# Altium PCB PortableCharger.PcbDoc
Units mm, origin at the board's own origin, x right, y up, seen from the top; angles counter-clockwise.
Board outline 40 x 25.02 mm, 2 copper layers (Top Layer, Bottom Layer); 30 components, 18 nets, 108 pads, 10 vias.
Unrouted connection lines stored in the file: 2.
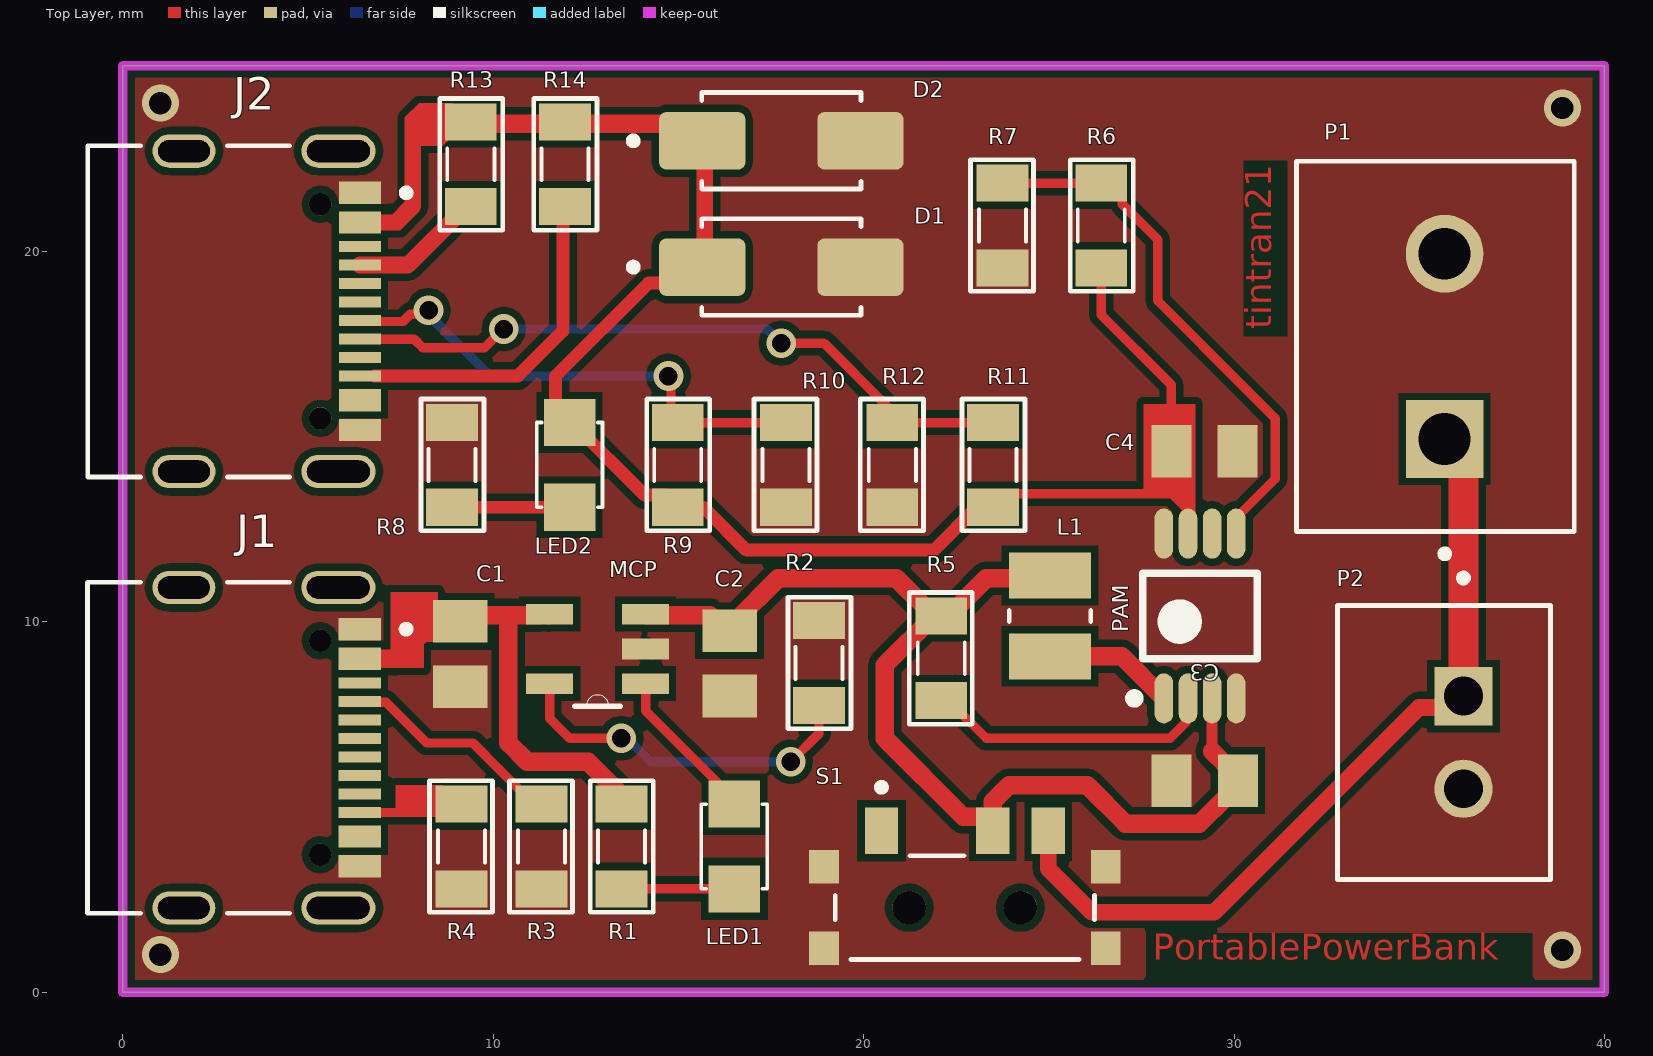
[diagram p0: Top Layer view]
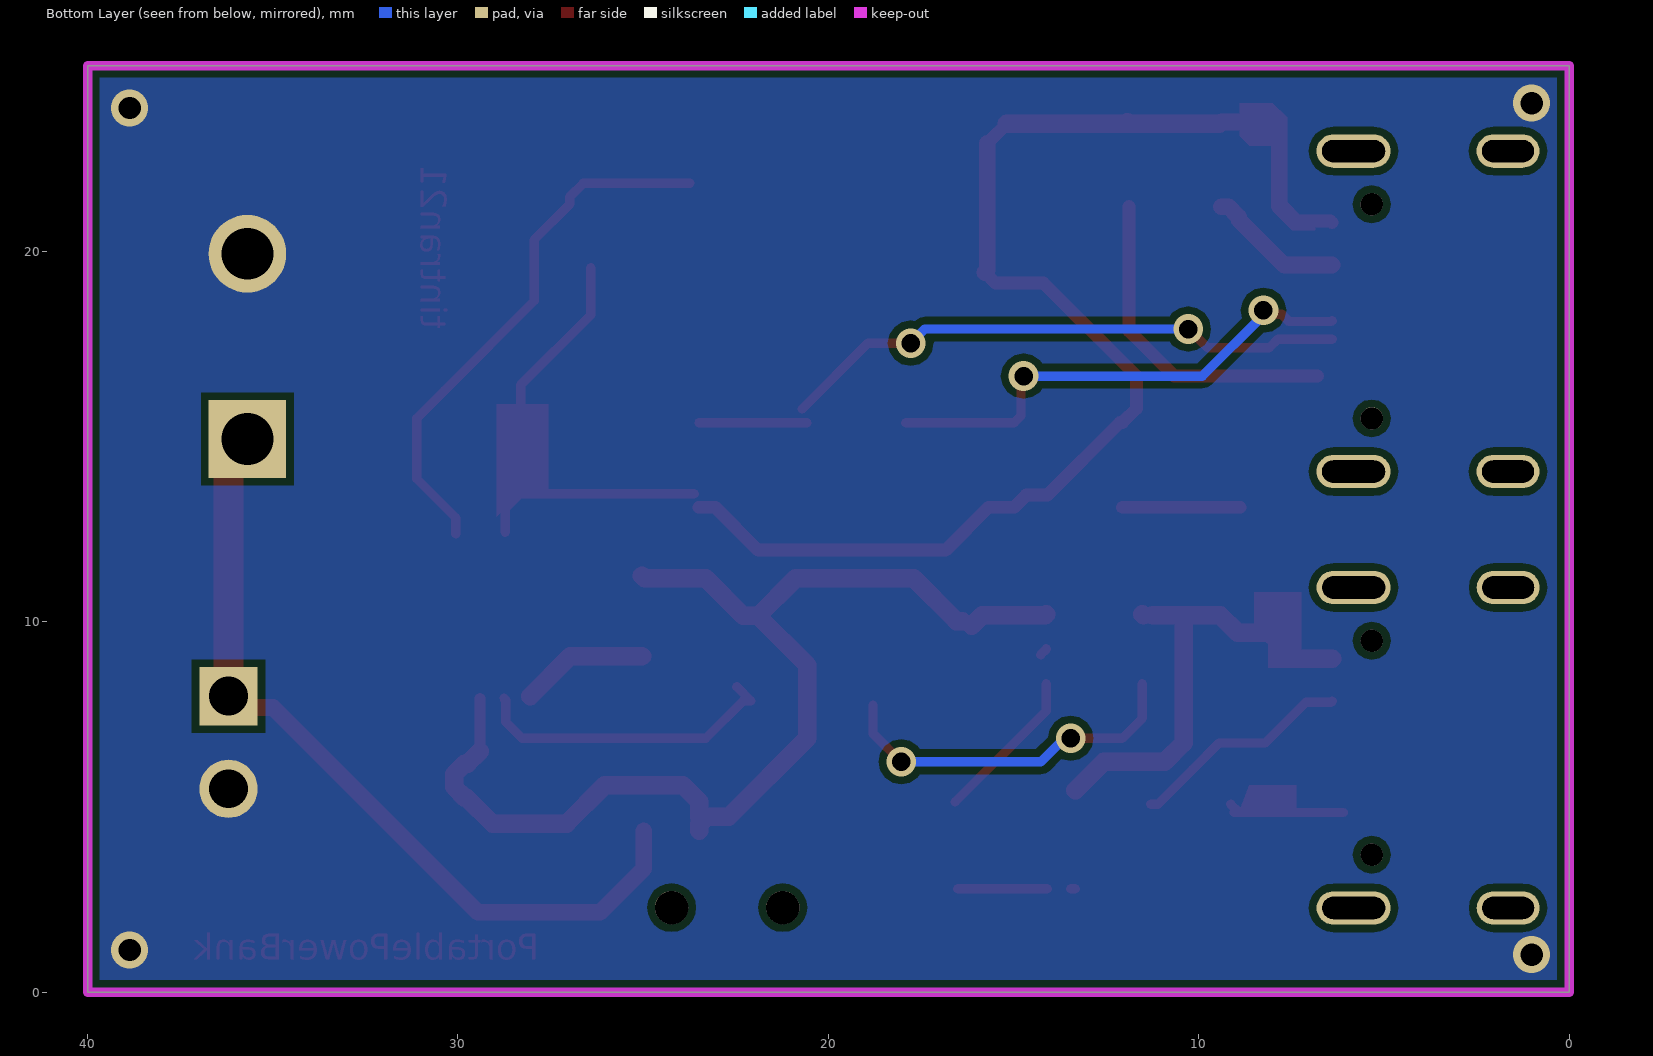
[diagram p1: Bottom Layer view, seen from below]
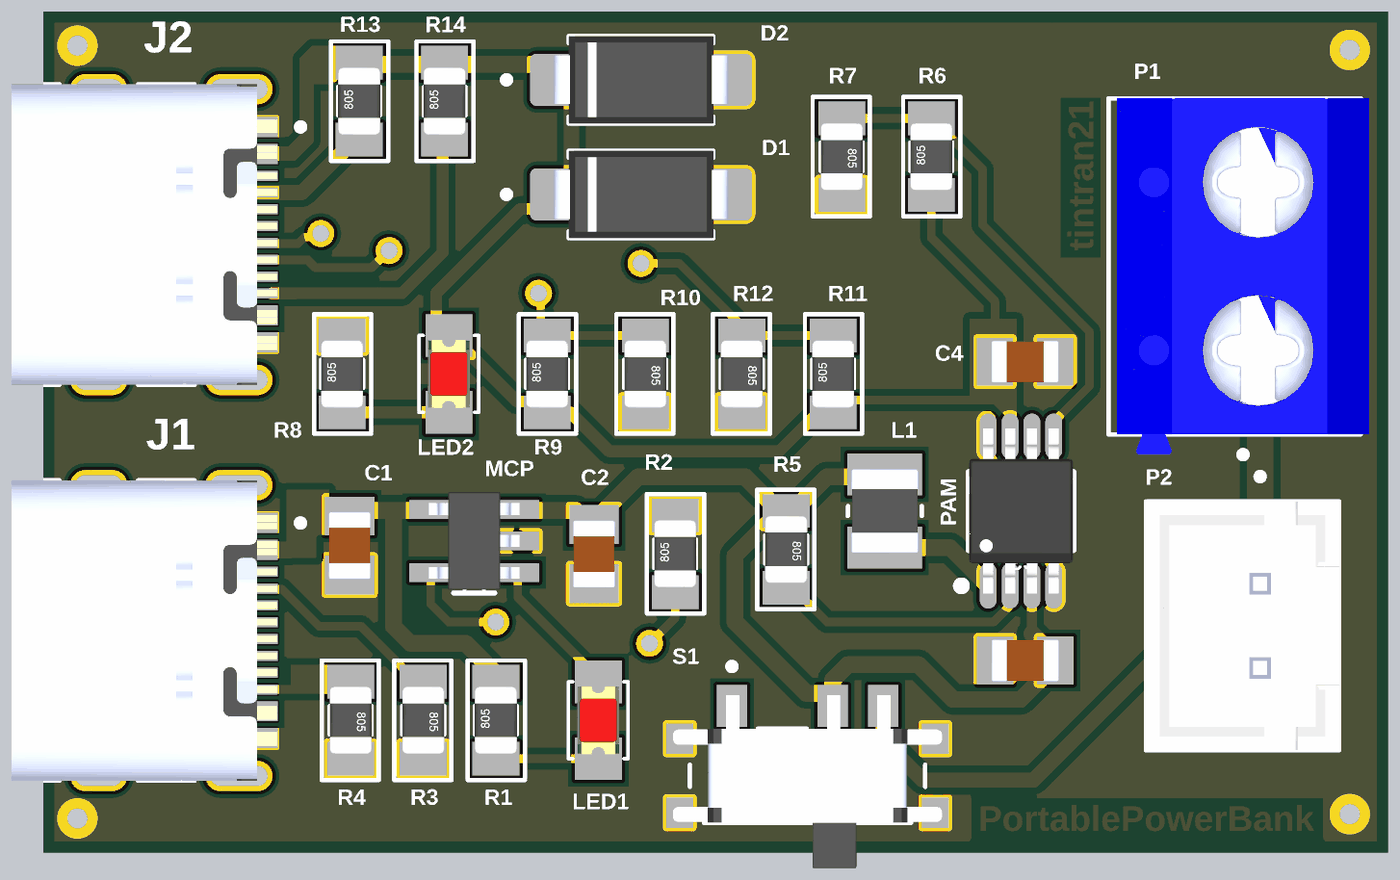
[diagram p2: 3D render of the assembled board from above, using the file's embedded part models]

## Layer stack, top to bottom
Top Solder: solder mask 0.0102, Solder Resist, Dk 3.5
Top Layer: signal copper 0.0356
Dielectric 1: dielectric 0.32, FR-4, Dk 4.8
Bottom Layer: signal copper 0.0356
Bottom Solder: solder mask 0.0102, Solder Resist, Dk 3.5

## Board outline
0,0 40,0 40,25.019 0,25.019

## Design rules (kind name [scope] priority, off if disabled: settings)
Clearance [All] p1: gap=0.2 ignorepadtopadclearanceinfootprint=TRUE
PolygonConnect [All] p1: connectstyle=Direct reliefconductorwidth=0.254 reliefentries=4 polygonreliefangle="90 Angle" airgapwidth=0.254
RoutingVias [All] p1: holewidth=0.711 width=1.27 viastyle="Through Hole" minholewidth=0.711 minwidth=1.27 maxholewidth=0.711 maxwidth=1.27
SolderMaskExpansion [All] p1: expansion=0.102 istentingtop=FALSE
Width PowerNets [InNetClass('PowerNets')] p1: maxlimit=1.3 minlimit=0.5 preferedwidth=0.5 minimp=50.000000 maximp=50.000000 favimp=50.000000
Width [All] p2: maxlimit=0.45 minlimit=0.254 preferedwidth=0.35
30 further rules are at their usual default settings.

## Classes and differential pairs
net class PowerNets: 5VIN NetC2_2 NetL1_2
component class Sheet2_StepUpDCDCConverter: C3 C4 D1 D2 J2 L1 LED2 PAM R5 R6 R7 R8 R9 R10 R11 R12 R13 R14
component class Sheet1_ChargeManagementControllers: C1 C2 J1 LED1 MCP P1 P2 R1 R2 R3 R4 S1

## Components (designator, comment, footprint, x,y, rotation, side; value= is the part's Value field where it differs from the comment)
C1 "4,7 uF" CAPC2012X150N 9.113,9.135 r270 top
C2 "4,7 uF" CAPC2012X150N 16.383,8.881 r90 top
C3 "22uF" CAPC2012X140N 29.21,5.715 r0 top
C4 "22uF" CAPC2012X140N 29.204,14.605 r180 top
D1 "40V1A" DIOM4326X240N 17.78,19.578 r0 top
D2 "40V1A" DIOM4326X240N 17.78,22.987 r0 top
J1 "TYPE-C-31-M-12" HRO_TYPE-C-31-M-12 1.651,6.604 r270 top
J2 "TYPE-C-31-M-12" HRO_TYPE-C-31-M-12 1.654,18.384 r270 top
L1 "2.2uH" INDC2520X100N 25.033,10.16 r270 top
LED1 "LED" LED-0805-Red 16.51,2.794 r90 top value="LED 3 - 5 ly 2 Colour"
LED2 "LED" LED-0805-Red 12.065,15.382 r270 top value="LED 3 - 5 ly 2 Colour"
MCP "MCP73831" SOT95P280X145-5N 12.819,9.271 r180 top
P1 "BAT OPT1" HANDSON_KF301-2P 35.687,17.439 r90 top
P2 "B2B-XH-A" JST_B2B-XH-A 35.67,6.745 r90 top
PAM "PAM2401" TSOP65P490X110-8N 29.083,10.16 r90 top
R1 "1K" RES-SMD-0805 13.462,3.937 r90 top
R2 "2K" RES-SMD-0805 18.796,8.89 r90 top
R3 "5.1K" RES-SMD-0805 11.303,3.937 r270 top
R4 "5.1K" RES-SMD-0805 9.144,3.937 r270 top
R5 "750k" RES-SMD-0805 22.098,9.017 r270 top
R6 "750k" RES-SMD-0805 26.416,20.701 r90 top
R7 "100k" RES-SMD-0805 23.749,20.701 r270 top
R8 "4.7k" RES-SMD-0805 8.89,14.239 r90 top
R9 "75k" RES-SMD-0805 14.986,14.239 r90 top
R10 "51k" RES-SMD-0805 17.907,14.239 r270 top
R11 "75k" RES-SMD-0805 23.495,14.239 r90 top
R12 "51K" RES-SMD-0805 20.777,14.239 r270 top
R13 "56k" RES-SMD-0805 9.398,22.352 r90 top
R14 "56k" RES-SMD-0805 11.938,22.352 r90 top
S1 "SW" SW_MSK12C02 22.733,2.286 r0 top

## Footprints (in the part's own frame and the unit in brackets; to place one, negate y for a bottom-side part, rotate by r counter-clockwise, add the part's x,y. Pads: shape width x height; smd on the part's side, far side on the other; paste and mask are expansions set on the pad)
CAPC2012X140N [mm]
  rect 1.08x1.42 smd paste+0 mask+0.102: 1(-0.895,0) 2(0.895,0)
  body extent -1,-0.63 1,0.63, height 1.4
CAPC2012X150N [mm]
  rect 1.15x1.47 smd: 1(-0.88,0) 2(0.88,0)
  body extent -1,-0.63 1,0.63, height 1.5
DIOM4326X240N [mm]
  rrect25% 2.33x1.55 smd: A(2.135,0) C(-2.135,0)
  silkscreen extent -4.1,-1.3 2.15,1.3, body extent -2.6,-1.3 2.6,1.3, height 2.4
HANDSON_KF301-2P [mm]
  rect 2.1x2.1 / inner round 2.1 / far side rect 2.1x2.1 hole 1.4: 1(-2.5,0)
  round 2.1 hole 1.4: 2(2.5,0)
  silkscreen extent -5.7,-3.5 5,4, body extent -5.6,-3.75 5,3.75, height 10
HRO_TYPE-C-31-M-12 [mm]
  rect 0.6x1.14 smd mask+0.05: A1_B12(-3.2,4.75) A4_B9(-2.4,4.75) B1_A12(3.2,4.75) B4_A9(2.4,4.75)
  rect 0.3x1.14 smd mask+0.05: A5(-1.25,4.75) A6(-0.25,4.75) A7(0.25,4.75) A8(1.25,4.75) B5(1.75,4.75) B6(0.75,4.75) B7(-0.75,4.75) B8(-1.75,4.75)
  oval 0.9x2 hole 0.6 slot 1.7 at 90 deg: S1(-4.325,4.17) S2(4.325,4.17)
  oval 0.9x1.7 hole 0.6 slot 1.4 at 90 deg: S3(-4.325,0) S4(4.325,0)
  round 0.6 hole 0.6 unplated: ""(-2.89,3.68) ""(2.89,3.68)
  silkscreen extent -4.47,-2.6 4.47,6.1, body extent -4.47,-2.6 4.47,5.31, height 3.31
INDC2520X100N [mm]
  rect 1.24x2.22 smd: 1(-1.09,0) 2(1.09,0)
  silkscreen extent -0.15,-1.1 0.15,1.1, body extent -1.25,-1 1.25,1, height 1
JST_B2B-XH-A [mm]
  rect 1.575x1.575 / inner round 1.575 / far side rect 1.575x1.575 hole 1.05: 1(1.25,-0.525)
  round 1.575 hole 1.05: 2(-1.25,-0.525)
  silkscreen extent -3.7,-2.88 4.54,2.88, body extent -3.7,-2.88 3.7,2.88, height 7.25
LED-0805-Red [mil]
  rect 50x55 smd: 1(0,0) 2(90,0)
  silkscreen extent 0,-35 90,35, body extent 5,-25 85,25, height 43
RES-SMD-0805 [mil]
  rect 39.37x55 smd: 1(-45,0) 2(45,0)
  silkscreen extent -70,-34 70,33, body extent -39,-25 39,25, height 31
SOT95P280X145-5N [mil]
  rect 50x22 smd: 1(-51,37) 2(-51,0) 3(-51,-37) 4(51,-37) 5(51,37)
  silkscreen extent -24,49 24,61, body extent -53,-57 53,57, height 57
SW_MSK12C02 [mm]
  rect 0.9x1.25 smd paste+0 mask+0.102: 1(-2.25,2.075) 2(0.75,2.075) 3(2.25,2.075)
  rect 0.8x0.9 smd paste+0 mask+0.102: 4_1(-3.8,1.1) 4_2(-3.8,-1.1) 4_3(3.8,-1.1) 4_4(3.8,1.1)
  round 0.9 hole 0.9 unplated mask+0: ""(-1.5,0) ""(1.5,0)
  silkscreen extent -3.5,-1.4 3.5,3.35, body extent -4,-2.75 4,2.4, height 1.5
TSOP65P490X110-8N [mm] "TSOP, 8-Leads, Body 3.00x3.00mm, Pitch 0.65mm, IPC Medium Density"
  oval 1.35x0.5 smd: 1(-2.225,0.975) 2(-2.225,0.325) 3(-2.225,-0.325) 4(-2.225,-0.975) 5(2.225,-0.975) 6(2.225,-0.325) 7(2.225,0.325) 8(2.225,0.975)
  silkscreen extent -2.35,-1.55 1.15,1.9, body extent -2.45,-1.55 2.45,1.55, height 1.1

## Part data
C1 C2: library part C2012X7R1V475M125AE, "Cap Ceramic 4.7uF 35V X7R 20% SMD 0805 125C T/R", Package=None, Availability=Unavailable, MP=altium_native_batch, Price=None
C3 C4: library part GRM21BR60J226ME39K, "SMD capacitor X5R(EIA) with capacitance 22uF Tol.20%. Rated voltage 6.3Vdc 85C", Package="2012 Murata", Check_prices=https://www.snapeda.com/parts/GRM21BR60J226ME39K/Murata+Electronics+North+America/view-part/?ref=eda, MF="Murata Electronics", MP=GRM21BR60J226ME39K, SnapEDA_Link=https://www.snapeda.com/parts/GRM21BR60J226ME39K/Murata+Electronics+North+America/view-part/?ref=snap
D1 D2: library part B140-13-F, "Schottky Diode 1A 40V 0.5Vf SMA", Package="DO-214 Diodes Inc.", Check_prices=https://www.snapeda.com/parts/B140-13-F/Diodes+Inc./view-part/?ref=eda, MF="Diodes Inc.", MP=B140-13-F, SnapEDA_Link=https://www.snapeda.com/parts/B140-13-F/Diodes+Inc./view-part/?ref=snap
J1 J2: "USB Connectors 24 Receptacle 1 8.94*7.3mm RoHS", Package=Package, Check_prices=https://www.snapeda.com/parts/TYPE-C-31-M-12/HRO+Electronics+Co.%252C+Ltd./view-part/?ref=eda, MF="HRO Electronics Co., Ltd.", MP=TYPE-C-31-M-12, SnapEDA_Link=https://www.snapeda.com/parts/TYPE-C-31-M-12/HRO+Electronics+Co.%252C+Ltd./view-part/?ref=snap
L1: library part LQM2HPN2R2MGSL, "Inductor with Inductance: 2.2uH Tol. +/-20%, Package: 1008 (2520)", Package="2520 Murata", Availability="In Stock", Check_prices=https://www.snapeda.com/parts/LQM2HPN2R2MGSL/Murata/view-part/1514108/?ref=eda, MF=Murata, MP=LQM2HPN2R2MGSL, Price=None, Purchase-URL=https://pricing.snapeda.com/search/part/LQM2HPN2R2MGSL/?ref=eda, SnapEDA_Link=https://www.snapeda.com/parts/LQM2HPN2R2MGSL/Murata/view-part/1514108/?ref=snap
LED1 LED2: library part "LED SMD"
MCP: library part MCP73831T-2ACI/OT, "Charger IC Lithium Ion/Polymer SOT-23-5", Package="SOT-23 Microchip", Availability="In Stock", Check_prices=https://www.snapeda.com/parts/MCP73831T-2ACI/OT/Microchip/view-part/?ref=eda, MF=Microchip, MP=MCP73831T-2ACI/OT, Price=None, Purchase-URL=https://pricing.snapeda.com/search/part/MCP73831T-2ACI/OT/?ref=eda, SnapEDA_Link=https://www.snapeda.com/parts/MCP73831T-2ACI/OT/Microchip/view-part/?ref=snap
P1: library part KF301-2P, "2 Pin Terminal Block 5mm Pitch", Package=None, Check_prices=https://www.snapeda.com/parts/KF301-2P/Handson+Technology/view-part/?ref=eda, MF="Handson Technology", MP=KF301-2P, SnapEDA_Link=https://www.snapeda.com/parts/KF301-2P/Handson+Technology/view-part/?ref=snap
R1 R2 R3 R4 R5 R6 R7 R8 R9 R10 R11 R12 R13 R14: library part Res-SMD, "Resistor", Manufacturer="Generic Components", Class=Passive, Published=08/06/2000, Publisher="Altium Hobart Technology Centre"
S1: library part MSK12C02, Package=None, Availability=Unavailable, MP=MSK12C02, Price=None

## Via types
v1: diameter 0.8, hole 0.5, Top Layer to Bottom Layer, 6 vias
v2: diameter 1, hole 0.6, Top Layer to Bottom Layer, 4 vias

## Nets (pads, with @x,y where several pads share a name; then routed paths per layer and width w, separated by ;. In a path a pad name is that pad's centre, name@x,y a point inside that pad or via, vN(x,y) a via of type N, cw(c..) or ccw(c..) an arc to the next point about the centre after c; other vN are vias at no path point)
5VIN: C1.1 J1.A4_B9 MCP.4 R1.2 | length 12.3
  Top Layer w0.5: J1.A4_B9 7.353,9.004 8.053,9.704 8.951,9.704 9.428,10.181 10.414,10.181 ; MCP.4@11.24,10.181 10.414,10.181 ; MCP.4@11.494,10.181 MCP.4 ; R1.2@13.335,5.461 13.325,5.461 12.563,6.223 10.922,6.223 10.414,6.731 10.414,10.181
+5: C4.2 D1.C D2.C J2.A4_B9 LED2.1 PAM.7 R6.1 R9.1 R11.1 | length 48.8
  Top Layer w0.254: R11.1@23.622,13.462 28.321,13.462 28.711,13.072 ; R6.1 26.416,18.288 28.309,16.395 C4.2 28.722,14.192 28.722,13.072 PAM.7@28.722,12.421
  Top Layer w0.35: J2.A4_B9 6.448,20.828 7.493,20.828 7.874,21.209 7.874,23.368 8.001,23.495 ; 9.398,23.495 9.449,23.444 ; D2.C@15.188,23.444 D2.C ; D1.C@15.772,19.431 15.487,19.146 14.193,19.146 11.684,16.637 11.684,15.763 LED2.1 12.128,15.382 14.089,13.421 14.661,13.421 R9.1 15.678,13.096 16.835,11.938 21.9,11.938 23.057,13.096 23.297,13.096 R11.1
  Top Layer w0.45: 8.001,23.495 9.398,23.495 ; D2.C@15.709,22.924 15.709,19.494 D1.C@15.772,19.431
  Top Layer w0.5: 9.449,23.444 11.887,23.444 ; 11.938,23.495 11.887,23.444 ; D2.C@15.188,23.444 11.887,23.444
CC1IN: J1.A5 R3.1 | length 6.1
  Top Layer w0.254: J1.A5 6.424,7.831 7.106,7.831 7.747,7.19 8.206,6.731 9.454,6.731 10.165,6.02 11.105,5.08 R3.1
CC1OUT: J2.A5 R13.1 | length 3.7
  Top Layer w0.45: J2.A5 7.696,19.634 8.925,20.863 8.925,20.934 9.2,21.209 R13.1
CC2IN: J1.B5 R4.1 | length 3.3
  Top Layer w0.254: J1.B5@6.097,4.854 R4.1@9.045,4.854 ; R4.1@8.918,4.854 R4.1
CC2OUT: J2.B5 R14.1 | length 8.9
  Top Layer w0.35: J2.B5@6.799,16.634 7.49,16.634 7.493,16.637 10.668,16.637 11.882,17.851 R14.1@11.882,21.209
D+: J2.A6 J2.B6 R11.2 R12.1 | length 18.4
  Top Layer w0.254: J2.B6 7.866,17.634 8.101,17.399 9.765,17.399 10.273,17.907 v1(10.287,17.907) ; v1(17.78,17.526) 18.928,17.526 R12.1@20.706,15.748 ; R12.1@20.579,15.382 R12.1 R11.2
  Bottom Layer w0.254: v1(10.287,17.907) 17.399,17.907 v1(17.78,17.526)
D-: J2.A7 R9.2 R10.1 | length 13.6
  Top Layer w0.254: J2.A7 6.427,18.111 7.57,18.111 7.77,18.311 8.151,18.311 v1(8.255,18.415) ; v1(14.732,16.637) 14.8,16.569 14.8,15.568 R9.2 R10.1
  Bottom Layer w0.254: v1(8.255,18.415) 8.255,18.288 9.906,16.637 v1(14.732,16.637)
GND: C1.2 C2.1 C3.1 C4.1 D1.A D2.A J1.A1_B12 J1.B1_A12 J2.A1_B12 J2.B1_A12 MCP.2 P1.2 P2.2 PAM.4 PAM.8 R2.2 R3.2 R4.2 R7.2 R8.2 R10.2 R12.2 S1.4_1 S1.4_2 S1.4_3 S1.4_4 | length 0.2
  Top Layer w0.254: MCP.2 MCP.2@14.267,9.119
  other v2: 1.016,1.016 38.862,1.143 38.862,23.876 1.016,24.003
NetC2_2: C2.2 C3.2 L1.1 MCP.3 PAM.3 R5.1 S1.2 | length 30.8
  Top Layer w0.3: 29.408,6.51 PAM.3
  Top Layer w0.5: MCP.3 14.144,10.181 15.845,10.181 C2.2@16.129,9.897 ; C2.2@16.383,10.024 16.543,10.024 17.695,11.176 20.884,11.176 R5.1@21.9,10.16 ; S1.2 23.483,4.536 23.283,4.736 22.696,4.736 20.574,6.858 20.574,8.835 R5.1@21.9,10.16 ; S1.2@23.483,4.736 23.483,5.143 23.928,5.588 26.035,5.588 27.068,4.555 29.068,4.555 29.768,5.255 29.815,5.255 30.105,5.545 30.105,5.885 29.815,6.175 29.743,6.175 29.408,6.51 ; L1.1 24.959,11.176 23.312,11.176 22.296,10.16 R5.1 R5.1@21.9,10.16
NetL1_2: L1.2 PAM.1 | length 3.5
  Top Layer w0.5: L1.2 26.973,9.07 PAM.1@28.055,7.989
NetLED1_1: LED1.1 R1.1 | length 2.5
  Top Layer w0.254: R1.1@13.335,2.794 R1.1 ; R1.1@14.097,2.794 LED1.1
NetLED1_2: LED1.2 MCP.1 | length 4.2
  Top Layer w0.254: MCP.1 14.115,7.602 LED1.2@16.573,5.143
NetLED2_2: LED2.2 R8.1 | length 3.2
  Top Layer w0.35: R8.1 LED2.2
NetMCP_5: MCP.5 R2.1 | length 9.8
  Top Layer w0.254: MCP.5 11.524,7.399 12.065,6.858 v1(13.462,6.858) ; v1(18.034,6.223) 18.796,6.985 R2.1
  Bottom Layer w0.254: v1(13.462,6.858) 13.629,6.858 14.264,6.223 v1(18.034,6.223)
NetP1_1: P1.1 P2.1 S1.3 | length 22.3
  Top Layer w0.45: S1.3 24.983,3.338 26.162,2.159 29.464,2.159 34.996,7.691 35.891,7.691 P2.1
  Top Layer w0.8: P1.1 36.195,14.431 P2.1
NetPAM_2: PAM.2 R5.2 | length 8.4
  Top Layer w0.254: R5.2@22.471,8.247 R5.2 22.296,7.874 23.313,6.858 28.272,6.858 28.711,7.297 28.711,7.888 PAM.2
NetPAM_5: PAM.5 R6.2 R7.1 | length 14.6
  Top Layer w0.254: R7.1 R6.2 26.614,21.844 26.987,21.471 26.987,21.272 27.94,20.32 27.94,18.668 30.353,16.255 31.115,15.493 31.115,13.867 30.058,12.81 PAM.5
pads on no net: J1. J1.A6 J1.A7 J1.A8 J1.B4_A9 J1.B6 J1.B7 J1.B8 J1.S1 J1.S2 J1.S3 J1.S4 J2. J2.A8 J2.B4_A9 J2.B7 J2.B8 J2.S1 J2.S2 J2.S3 J2.S4 PAM.6 R13.2 R14.2 S1. S1.1

## Polygon pours and split planes (outlines as drawn)
GND on Top Layer "GND_L01_P000" (solid, pour order 0): 0,25 40,25 40,0 0,0
GND on Bottom Layer "GND_L02_P001" (solid, pour order 1): 0,25 40,25 40,0 0,0

## Keep-outs
Keep-Out Layer:
  lines w0.254: 0,25 0,0 40,0 40,25 ; 0,25.019 40,25.019

## Other copper
Top Layer:
  region net +5: 27.559,15.875 27.559,13.462 28.332,13.462 28.722,13.072 28.956,12.838 28.956,13.081 28.956,15.875
  region net CC2IN: 7.366,4.854 7.366,5.588 8.636,5.588 8.918,4.854
  region net +5: 6.858,20.574 7.493,20.574 8.001,21.082 8.001,22.86 8.636,22.86 8.89,23.114 8.89,24.003 8.001,24.003 7.62,23.622 7.62,21.336 7.239,20.955 6.858,20.955
  region net 5VIN: 8.502,10.795 7.239,10.795 7.239,8.763 8.128,8.763 8.128,9.398 8.502,9.704
  text "tintran21" at 31.23,17.907 h1.2 r90
  text "PortablePowerBank" at 27.813,0.647 h1.2